# Altium PCB PCB.PcbDoc (part 2 of 2)
Units mil, origin at the board's own origin, x right, y up, seen from the top; angles counter-clockwise.
Board outline 11660 x 8265 mil, 2 copper layers (Top Layer, Bottom Layer); 173 components, 215 nets, 767 pads, 260 vias.
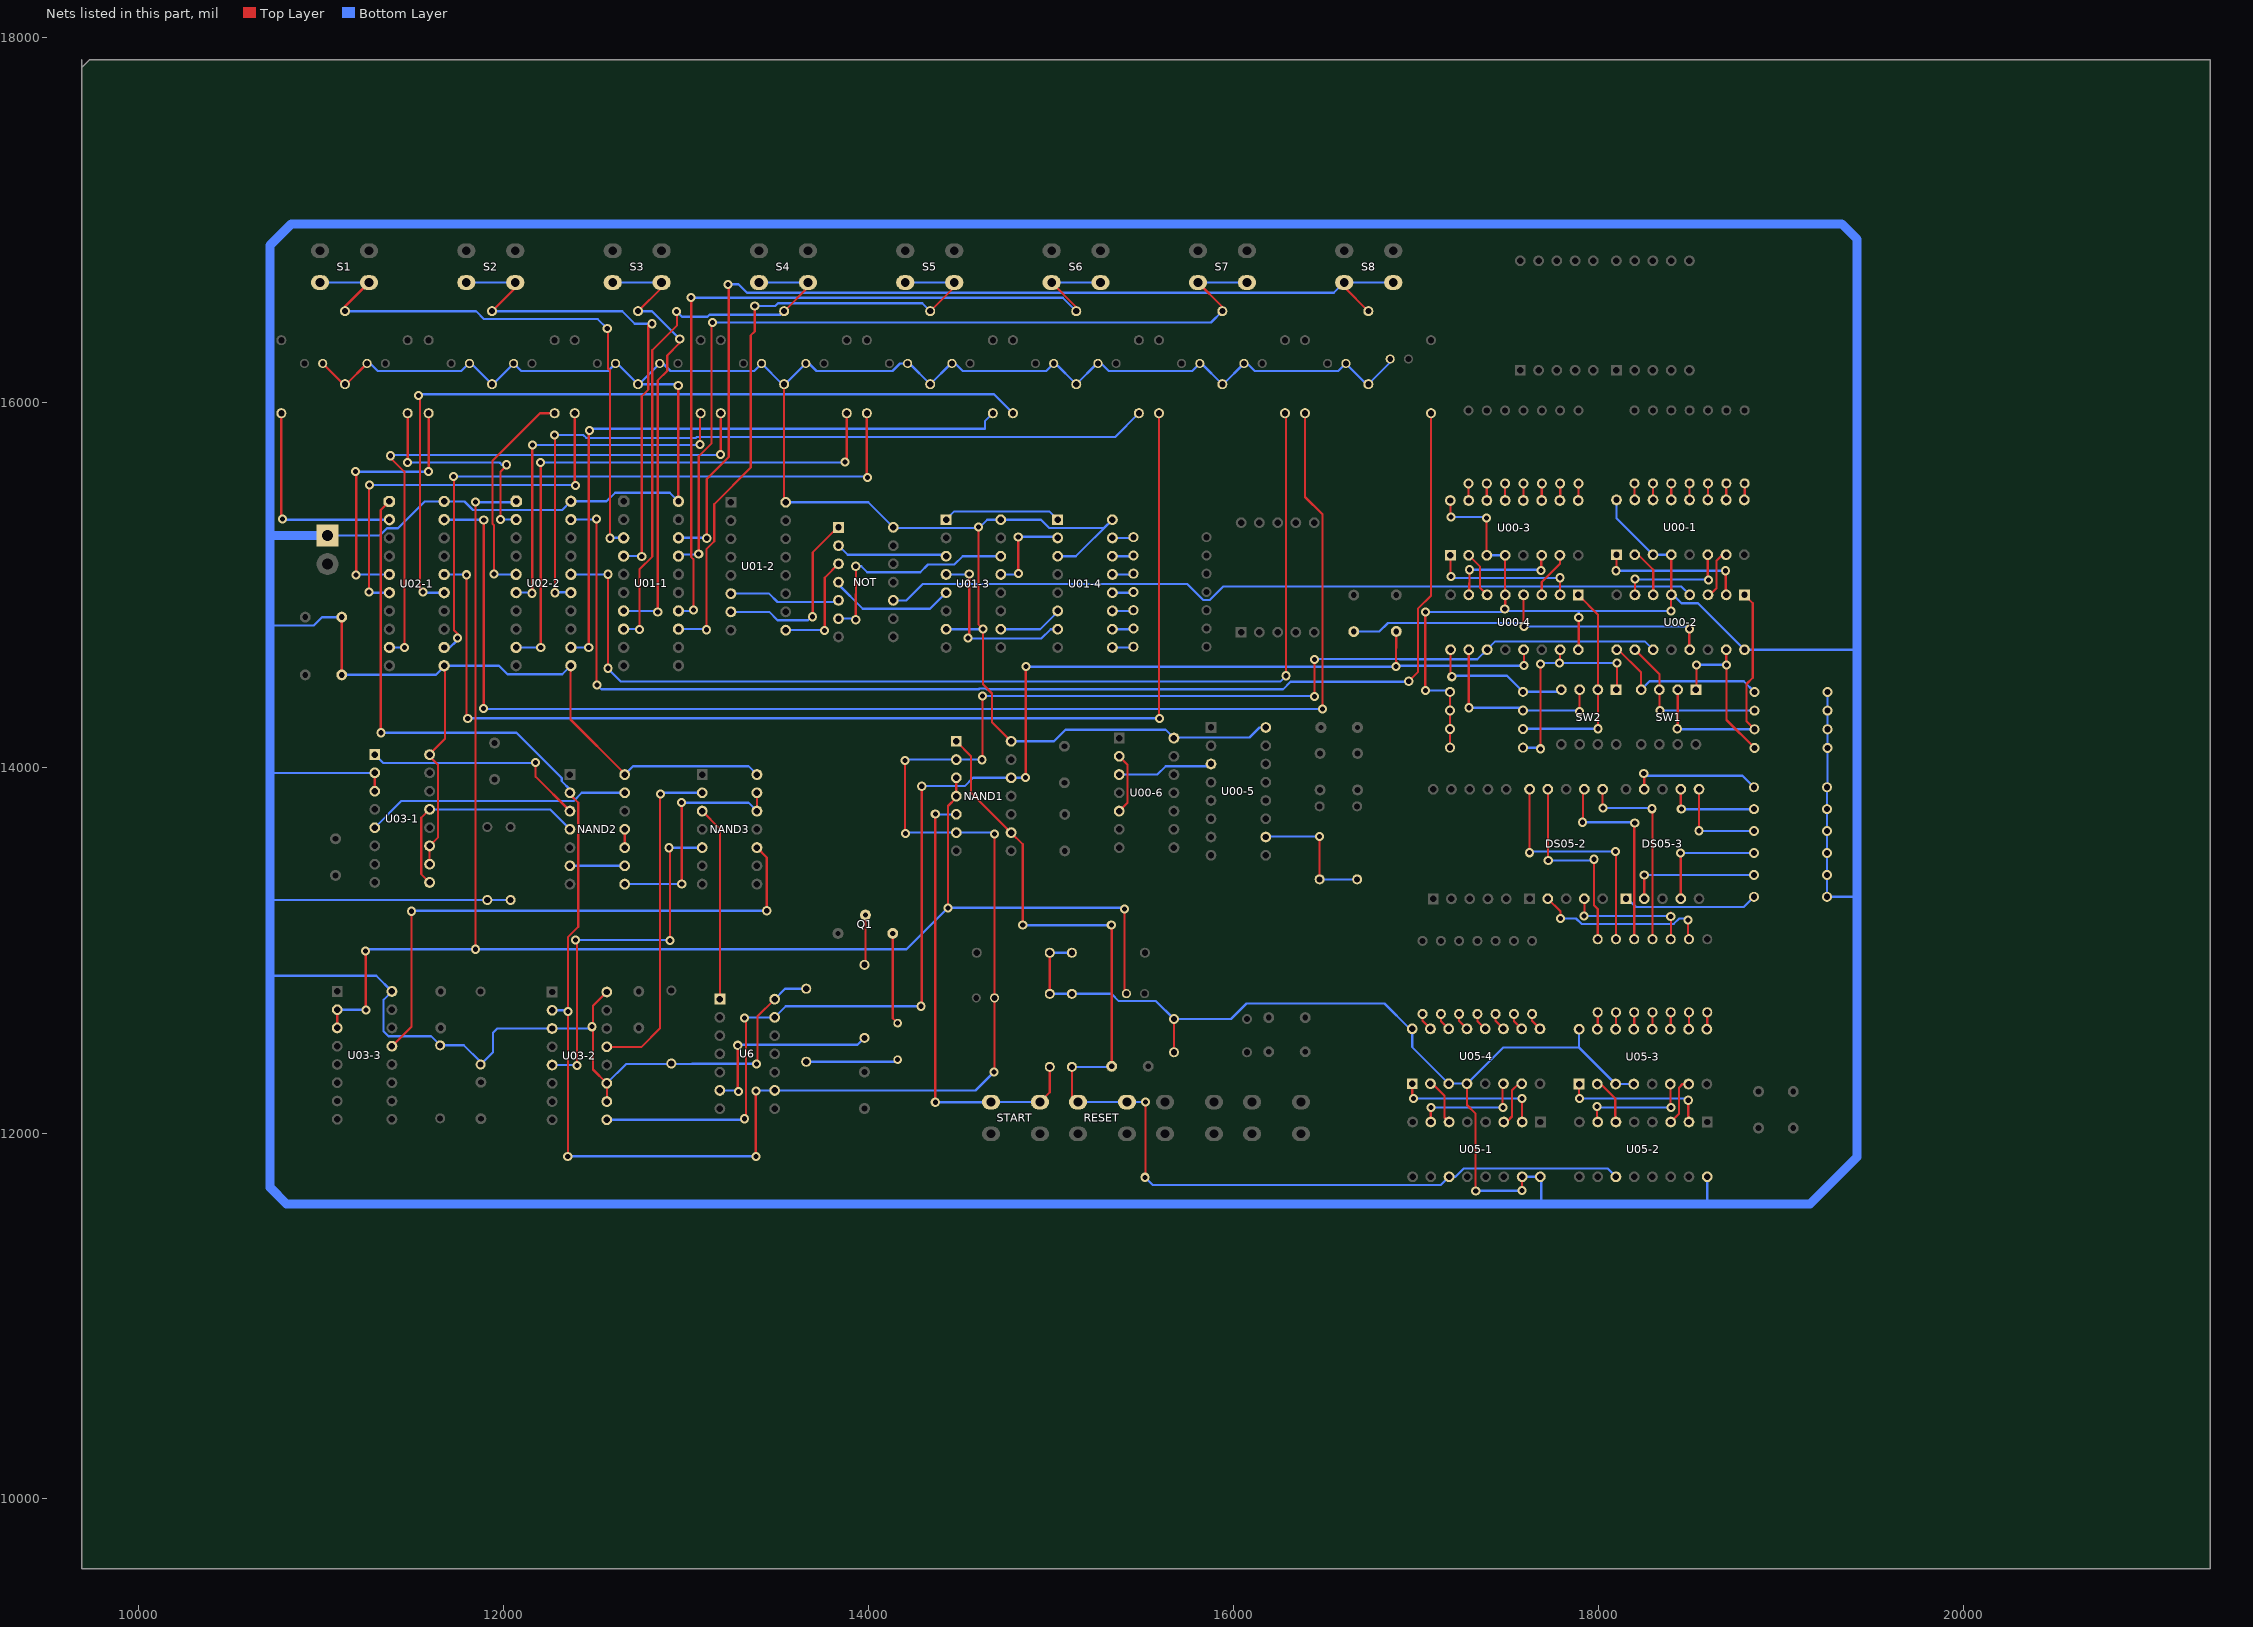
[diagram p2: the nets of this part, all layers, seen from the top]

## Via types
v1: diameter 50, hole 28, Top Layer to Bottom Layer, 260 vias

## Nets (pads, with @x,y where several pads share a name; then routed paths per layer and width w, separated by ;. In a path a pad name is that pad's centre, name@x,y a point inside that pad or via, vN(x,y) a via of type N, cw(c..) or ccw(c..) an arc to the next point about the centre after c; other vN are vias at no path point) (continued)
NetDS05-2_2: DS05-2.2 R262.2 | length 966.9
  Top Layer w12: DS05-2.2@17721,13284 17790,13215 v1@17790,13178 ; v1(18489,13168) 18489,13067.03 R262.2@18494.03,13062
  Bottom Layer w12: v1(17790,13176) 17875.02,13176 17905.02,13146 18410.98,13146 18440.98,13176 18488,13176 v1@18489,13177
NetDS05-2_4: DS05-2.4 R261.2 | length 699.5
  Top Layer w12: v1@17920,13208 17921,13209 DS05-2.4@17921,13284 ; v1@18394,13208 18394,13185 18395,13184 18395,13062.97 R261.2@18394.03,13062
  Bottom Layer w12: v1(17919,13190) 18391,13190 v1(18394,13187)
NetDS05-2_6: DS05-2.6 R260.2 | length 1093.7
  Top Layer w12: v1@18021,13779 DS05-2.6@18021,13884 ; v1@18294,13780 18294,13770 18294.53,13769.47 18294.53,13062.5 R260.2@18294.03,13062
  Bottom Layer w12: v1(18023,13780) 18289,13780 v1(18292,13777)
NetDS05-2_7: DS05-2.7 R259.2 | length 1112.8
  Top Layer w12: v1@17913,13702 17913,13876 DS05-2.7@17921,13884 ; v1@18194,13700 18194.53,13699.47 18194.53,13062.5 R259.2@18194.03,13062
  Bottom Layer w12: v1(17910,13703) 18192,13703 v1(18197,13698)
NetDS05-2_9: DS05-2.9 R264.2 | length 1086.6
  Top Layer w12: v1@17720,13498 17721,13499 DS05-2.9@17721,13884 ; v1@17973,13501 17973,13249.05 17994.03,13228.02 R264.2@17994.03,13062
  Bottom Layer w12: v1(17723,13494) 17967,13494 v1(17973,13500)
NetDS05-2_10: DS05-2.10 R265.2 | length 1294.6
  Top Layer w12: DS05-2.10@17621,13884 17621,13544 v1@17623,13542 ; v1@18091,13538 18094.03,13534.97 R265.2@18094.03,13062
  Bottom Layer w12: v1(17620,13536) 17626,13542 v1(18092,13542)
NetDS05-3_1: DS05-3.1 R270.2 | length 743
  Bottom Layer w12: DS05-3.1@18149,13284 18157.94,13284 18203.47,13238.47 18794.06,13238.47 R270.2@18850,13294.41
NetDS05-3_2: DS05-3.2 R269.2 | length 732
  Top Layer w12: DS05-3.2@18249,13284 v1(18249,13413) v1@18250,13412
  Bottom Layer w12: v1(18249,13413) 18848.59,13413 R269.2@18850,13414.41
NetDS05-3_4: DS05-3.4 R268.2 | length 654.1
  Top Layer w12: DS05-3.4@18449,13284 18449,13533 v1@18451,13535
  Bottom Layer w12: v1(18448,13535) 18849.41,13535 R268.2@18850,13534.41
NetDS05-3_6: DS05-3.6 R267.2 | length 543.9
  Top Layer w12: v1(18549,13656) DS05-3.6@18549,13884
  Bottom Layer w12: v1@18549,13661 18555.59,13654.41 R267.2@18850,13654.41 R267.2@18841.41,13663
NetDS05-3_7: DS05-3.7 R266.2 | length 507.8
  Top Layer w12: DS05-3.7@18449,13884 18449,13779 v1(18452,13776)
  Bottom Layer w12: v1@18451.41,13774.41 R266.2@18850,13774.41
NetDS05-3_9: DS05-3.9 R271.2 | length 718.3
  Top Layer w12: DS05-3.9@18249,13884 v1@18249,13967
  Bottom Layer w12: v1(18246,13970) 18259,13957 18787.41,13957 R271.2@18850,13894.41
NetNAND1_5: NAND1.5 R203.2 START.2 | length 3016.9
  Top Layer w12: v1@14363,12169 14366,12172 v1(14366,13747) ; START.2@14939,12170 14993,12224 R203.2@14993,12363
  Bottom Layer w12: v1(14366,12169) 14670,12169 START.2@14671,12170 ; v1@14369,13748 14371,13746 NAND1.5@14481,13746 ; START.2@14671,12170 START.2@14939,12170 ; START.2@14671,12170 START.2@14939,12170 ; START.2@14671,12170 START.2@14939,12170
NetNAND2_3: NAND2.3 U03-1.1 | length 1239.3
  Top Layer w12: v1(12177,14030) 12177,13952 NAND2.3@12365,13764
  Bottom Layer w12: U03-1.1@11296,14073.13 11341.53,14027.6 v1@12172.6,14027.6
NetNAND2_4: NAND2.4 U03-1.9 U03-1.13 | length 1251.9
  Top Layer w12: U03-1.9@11596,13373.13 11550.47,13418.65 11550.47,13727.6 U03-1.13@11596,13773.13
  Bottom Layer w12: U03-1.13@11596,13773.13 12255.87,13773.13 NAND2.4@12365,13664
NetNAND2_6: NAND2.6 NAND2.9 | length 300
  Bottom Layer w12: NAND2.6@12365,13464 NAND2.9@12665,13464
NetNAND2_8: NAND2.8 NAND3.12 NAND3.13 | length 1294.9
  Top Layer w12: v1(12977,13364) v1@12977,13811 ; NAND3.12@13389,13764 NAND3.13@13389,13864
  Bottom Layer w12: NAND2.8@12665,13364 12978,13364 v1@12979,13363 ; v1(12975,13811) 12976.47,13809.53 13343.47,13809.53 NAND3.12@13389,13764
NetNAND2_10: NAND2.10 NAND2.11 | length 100
  Top Layer w12: NAND2.10@12665,13564 NAND2.11@12665,13664
NetNAND2_13: NAND2.13 U03-1.5 | length 1448.2
  Bottom Layer w12: U03-1.5@11296,13673.13 11441.53,13818.65 11615.04,13818.65 11615.22,13818.47 12383.86,13818.47 12429.39,13864 NAND2.13@12665,13864
NetNAND3_2: NAND3.2 U03-2.13 | length 1857.3
  Top Layer w12: U03-2.13@12566,12471 12755,12471 12858,12574 12858,13856 v1(12860,13858)
  Bottom Layer w12: v1@12852,13866 12854,13864 NAND3.2@13089,13864
NetNAND3_3: NAND3.3 U6.1 | length 1070.2
  Top Layer w12: NAND3.3@13089,13764 13186,13667 U6.1@13186,12734
NetNAND3_5: NAND3.5 U03-2.5 | length 2034.1
  Top Layer w12: v1(12404,12370) v1@12404,13063 ; v1(12913,13055) 12913,13563 v1@12914,13564
  Bottom Layer w12: U03-2.5@12267,12373 12402,12373 v1@12404,12371 ; v1(12396,13058) 12907,13058 v1@12908,13057 ; v1(12908,13563) 13088,13563 NAND3.5@13089,13564
NetNAND3_10: NAND3.10 U03-3.13 | length 3087.7
  Top Layer w12: U03-3.13@11390,12476 11497,12583 v1(11497,13215) ; NAND3.10@13389,13564 13443,13510 v1@13443,13224
  Bottom Layer w12: v1@11501,13218 v1(13443,13218)
NetNOT_1: NOT.1 U01-2.7 | length 1010.1
  Top Layer w12: v1(13693,14828) 13695,14830 13695,15181 13831.87,15317.87 NOT.1@13835.84,15317.87
  Bottom Layer w12: U01-2.7@13246.76,14855 13455.71,14855 13501.24,14809.47 13667.47,14809.47 v1@13681,14823
NetNOT_2: NOT.2 U01-3.3 | length 613.1
  Bottom Layer w12: NOT.2@13835.84,15217.87 13885.72,15168 14416.92,15168 U01-3.3@14424.92,15160
NetNOT_3: NOT.3 U01-2.9 | length 609.5
  Top Layer w12: v1(13760,14754) 13760,15042.03 NOT.3@13835.84,15117.87
  Bottom Layer w12: U01-2.9@13546.76,14755 v1@13761,14755
NetNOT_4: NOT.4 U01-3.5 | length 693.1
  Bottom Layer w12: NOT.4@13835.84,15017.87 13835.84,15005.16 13968.65,14872.35 14337.27,14872.35 U01-3.5@14424.92,14960
NetNOT_5: NOT.5 U01-2.6 | length 611.4
  Bottom Layer w12: U01-2.6@13246.76,14955 13455.71,14955 13501.24,14909.47 13827.44,14909.47 NOT.5@13835.84,14917.87
NetNOT_6: NOT.6 U01-3.14 | length 1227
  Top Layer w12: v1(13930,14812) v1@13931,15100
  Bottom Layer w12: NOT.6@13835.84,14817.87 13929.87,14817.87 v1@13930,14818 ; v1(13930,15105) 13961,15105 13993.65,15072.35 14284.35,15072.35 14326.47,15114.47 14470.45,15114.47 14515.98,15160 U01-3.14@14724.92,15160
NetNOT_10: NOT.10 U00-2.4 | length 4462.9
  Bottom Layer w12: NOT.10@14157.84,14917.87 14207.87,14917.87 14297.56,15007.56 15745.84,15007.56 15832.96,14920.44 15869.04,14920.44 15942.6,14994 18452.03,14994 U00-2.4@18498.03,14948
NetQ1_2: Q1.2 R155.2 | length 271.5
  Top Layer w12: R155.2@13978,12922 13983.94,12927.94 Q1.2@13983.94,13191
NetQ1_3: Q1.3 SP.2 | length 503.2
  Top Layer w12: Q1.3@14133,13094 14133,12629 SP.2@14160,12602
NetR00_2: R00.2 SW1.4 U00-2.9 | length 943.8
  Top Layer w12: U00-2.9@18098.03,14648 18107,14648 18232,14523 SW1.4@18232,14429
  Bottom Layer w12: SW1.4@18232,14429 18277.53,14474.53 18794.47,14474.53 R00.2@18853,14416
NetR01_2: R01.2 SW1.3 U00-2.10 | length 903.9
  Top Layer w12: U00-2.10@18198.03,14648 18332,14514.03 SW1.3@18332,14429 v1@18332,14318
  Bottom Layer w12: v1(18335,14315) 18852,14315 R01.2@18853,14314
NetR02_2: R02.2 SW1.2 U00-2.1 | length 1422.9
  Top Layer w12: v1(18430,14215) 18432,14217 SW1.2@18432,14429 ; U00-2.1@18798.03,14948 18843.56,14902.47 18843.56,14493.68 18809.44,14459.56 18809.44,14255.56 R02.2@18853,14212
  Bottom Layer w12: v1@18432,14212 R02.2@18853,14212
NetR03_2: R03.2 SW1.1 U00-2.15 | length 895.6
  Top Layer w12: SW1.1@18532,14429 18535,14432 v1(18535,14565) ; v1@18698.03,14568.03 U00-2.15@18698.03,14648 ; v1(18700,14565) 18700,14263 R03.2@18853,14110
  Bottom Layer w12: v1@18540,14565 v1(18700,14565)
NetR04_2: R04.2 SW2.4 U00-4.9 | length 792.3
  Top Layer w12: U00-4.9@17188.03,14648 17188.03,14506.97 v1(17195,14500)
  Bottom Layer w12: v1@17195,14505 17497,14505 R04.2@17585,14417 17783,14417 SW2.4@17795,14429
NetR05_2: R05.2 SW2.3 U00-4.10 | length 1067.3
  Top Layer w12: U00-4.10@17288.03,14648 17288.03,14331.97 v1(17290,14330) ; v1@17895,14315 SW2.3@17895,14429
  Bottom Layer w12: v1(17290,14330) R05.2@17570,14330 ; v1(17895,14310) 17890,14315 R05.2@17585,14315 ; R05.2@17570,14330 R05.2@17585,14315 ; R05.2@17570,14330 R05.2@17585,14315
NetR06_2: R06.2 SW2.2 U00-4.1 | length 1188.1
  Top Layer w12: U00-4.1@17888.03,14948 17995,14841.03 SW2.2@17995,14429 v1(17995,14215)
  Bottom Layer w12: R06.2@17585,14213 17587,14215 v1(17995,14215)
NetR07_2: R07.2 SW2.1 U00-4.15 | length 1183.1
  Top Layer w12: v1@17680,14115 v1(17680,14570) ; v1@17788.03,14581.97 U00-4.15@17788.03,14648 ; SW2.1@18095,14429 18100,14434 v1(18100,14575)
  Bottom Layer w12: R07.2@17585,14111 v1@17679,14111 ; v1@17680,14575 v1(17785,14575) v1(18100,14575)
  other v1: 17680,14105
NetR08_1: R08.1 U00-3.13 | length 93
  Top Layer w12: U00-3.13@17487.03,15465 R08.1@17487,15558
NetR09_1: R09.1 U00-3.12 | length 93.2
  Top Layer w12: U00-3.12@17587.03,15465 17587.5,15465.47 R09.1@17587.5,15558
NetR10_1: R10.1 U00-3.11 | length 93.4
  Top Layer w12: U00-3.11@17687.03,15465 17688,15465.97 R10.1@17688,15558
NetR11_1: R11.1 U00-3.10 | length 93.6
  Top Layer w12: U00-3.10@17787.03,15465 17788.5,15466.47 R11.1@17788.5,15558
NetR12_1: R12.1 U00-3.9 | length 93.8
  Top Layer w12: U00-3.9@17887.03,15465 17889,15466.97 R12.1@17889,15558
NetR13_1: R13.1 U00-3.15 | length 93.4
  Top Layer w12: R13.1@17286,15558 17286,15466.03 U00-3.15@17287.03,15465
NetR14_1: R14.1 U00-3.14 | length 93.2
  Top Layer w12: R14.1@17386.5,15558 17386.5,15465.53 U00-3.14@17387.03,15465
NetR15_1: R15.1 U00-1.13 | length 91
  Top Layer w12: U00-1.13@18397.03,15468 R15.1@18397,15559
NetR16_1: R16.1 U00-1.12 | length 91.2
  Top Layer w12: U00-1.12@18497.03,15468 18497.5,15468.47 R16.1@18497.5,15559
NetR17_1: R17.1 U00-1.11 | length 91.4
  Top Layer w12: U00-1.11@18597.03,15468 18598,15468.97 R17.1@18598,15559
NetR18_1: R18.1 U00-1.10 | length 91.6
  Top Layer w12: U00-1.10@18697.03,15468 18698.5,15469.47 R18.1@18698.5,15559
NetR19_1: R19.1 U00-1.9 | length 91.8
  Top Layer w12: U00-1.9@18797.03,15468 18799,15469.97 R19.1@18799,15559
NetR20_1: R20.1 U00-1.15 | length 91.4
  Top Layer w12: U00-1.15@18196,15469.03 R20.1@18196,15559
  Top Layer w50: U00-1.15@18196,15469.03 U00-1.15@18197.03,15468
NetR21_1: R21.1 U00-1.14 | length 91.2
  Top Layer w12: U00-1.14@18296.5,15468.53 R21.1@18296.5,15559
  Top Layer w50: U00-1.14@18296.5,15468.53 U00-1.14@18297.03,15468
NetR22_1: R22.1 R23.1 U00-5.10 | length 735.4
  Top Layer w12: R23.1@16471,13390 v1(16471,13624)
  Bottom Layer w12: U00-5.10@16176,13621.88 16178.12,13624 v1(16471,13624) ; R23.1@16471,13390 R22.1@16676.56,13390
NetR50_1: R50.1 S1.2 U01-1.3 | length 3180.2
  Top Layer w12: R50.1@11133,16502 11133,16528 S1.2@11264,16659 ; v1@12573.58,16411.58 12573.58,16188.15 12584,16177.73 v1(12584,15258)
  Bottom Layer w12: S1.2@10996,16659 S1.2@11264,16659 ; R50.1@11133,16502 11850.88,16502 11894.44,16458.44 12517.56,16458.44 v1(12569,16407) ; v1@12591.51,15260.51 U01-1.3@12659.16,15260.51
NetR51_1: R51.1 S2.2 U01-1.4 | length 2774.9
  Top Layer w12: R51.1@11938,16502 12065.43,16629.43 S2.2@12065.43,16659 ; v1(12758,15158) 12758,16036.84 12793.6,16072.44 12793.6,16425.6 v1@12802,16434
  Bottom Layer w12: S2.2@11797.43,16659 S2.2@12065.43,16659 ; R51.1@11938,16502 12650.88,16502 12719.88,16433 v1(12814,16433) ; U01-1.4@12665.65,15167 U01-1.4@12659.16,15160.51 12737.51,15160.51 v1@12739,15162 ; v1(12758,15158) 12756,15160 12756,15163 v1@12758,15165
NetR52_1: R52.1 S3.2 U01-1.7 | length 2501.1
  Top Layer w12: R52.1@12738,16502 12866.86,16630.86 S3.2@12866.86,16659 ; v1(12846,14854) 12846,16122.96 12897.6,16174.56 12897.6,16259.6 12964,16326 v1@12964,16349
  Bottom Layer w12: S3.2@12598.86,16659 S3.2@12866.86,16659 ; U01-1.7@12659.16,14860.51 12843.51,14860.51 v1@12846,14863 ; R52.1@12738,16502 12814,16502 v1(12966,16350)
NetR53_1: R53.1 S4.2 U01-1.8 | length 2999
  Top Layer w12: v1(12745,14758) 12745,15087.02 12815.6,15157.62 12815.6,16288.6 12952,16425 v1@12952,16502 ; R53.1@13538,16502 13668.29,16632.29 S4.2@13668.29,16659
  Bottom Layer w12: U01-1.8@12659.16,14760.51 12734.49,14760.51 v1@12735,14760 ; v1(12949,16501) 12979,16471 13118.02,16471 13129.02,16482 13518,16482 R53.1@13538,16502 ; S4.2@13400.29,16659 S4.2@13668.29,16659
NetR54_1: R54.1 S5.2 U01-1.13 | length 3497.8
  Top Layer w12: v1(13112,14757) 13112,15198.02 13155,15241.02 13155,15444.92 13355.58,15645.5 13355.58,16369.58 ; 13356,16370 13355.58,16369.58 ; v1(13377,16530) 13377,16391 13355.58,16369.58 ; R54.1@14338,16502 14469.71,16633.71 S5.2@14469.71,16659
  Bottom Layer w12: U01-1.13@12959.16,14760.51 v1@13108.51,14760.51 ; v1(13377,16530) 13488.84,16530 13504.4,16545.56 14294.44,16545.56 R54.1@14338,16502 ; S5.2@14201.71,16659 S5.2@14469.71,16659
NetR55_1: R55.1 S6.2 U01-1.14 | length 4406.6
  Top Layer w12: v1@13030,16567 13029,16566 13029,15155.02 13041,15143.02 v1(13041,14865) ; S6.2@15003.14,16659 15138,16524.14 R55.1@15138,16502
  Bottom Layer w12: U01-1.14@12959.16,14860.51 13029.51,14860.51 v1@13034,14865 ; v1(13027,16576) 15064,16576 R55.1@15138,16502 ; S6.2@15003.14,16659 S6.2@15271.14,16659
NetR56_1: R56.1 S7.2 U01-1.17 | length 4707.7
  Top Layer w12: v1(13070,15172) 13070,15707.02 13141,15778.02 v1@13141,16439 ; S7.2@15804.57,16659 15938,16525.57 R56.1@15938,16502
  Bottom Layer w12: U01-1.17@12959.16,15160.51 12967.65,15169 v1@13068,15169 ; v1(13145,16440) 15876,16440 R56.1@15938,16502 ; S7.2@15804.57,16659 S7.2@16072.57,16659
NetR57_1: R57.1 S8.2 U01-1.18 | length 5484.1
  Top Layer w12: v1(13114,15258) 13114,15583.02 13234.56,15703.58 13234.56,16649.44 v1@13234,16650 ; S8.2@16606,16659 16606,16634 R57.1@16738,16502
  Bottom Layer w12: U01-1.18@12959.16,15260.51 13110.51,15260.51 v1@13114,15264 ; v1(13231,16649) 13288.29,16649 13334.29,16603 16549,16603 S8.2@16602,16656 ; S8.2@16606,16659 S8.2@16868,16658
NetR58_1: R58.1 U01-4.13 | length 116.7
  Bottom Layer w12: U01-4.13@15336,15060 15447,15060 R58.1@15451,15064
NetR59_1: R59.1 U01-4.12 | length 116.7
  Bottom Layer w12: U01-4.12@15336,14960 15447,14960 R59.1@15451,14964
NetR60_1: R60.1 U01-4.11 | length 116.7
  Bottom Layer w12: U01-4.11@15336,14860 15447,14860 R60.1@15451,14864
NetR61_1: R61.1 U01-4.10 | length 117.7
  Bottom Layer w12: U01-4.10@15336,14760 15448,14760 R61.1@15452,14764
NetR62_1: R62.1 U01-4.9 | length 116.7
  Bottom Layer w12: U01-4.9@15336,14660 15447,14660 R62.1@15451,14664
NetR63_1: R63.1 U01-4.15 | length 116.7
  Bottom Layer w12: U01-4.15@15336,15260 15447,15260 R63.1@15451,15264
NetR64_1: R64.1 U01-4.14 | length 116.7
  Bottom Layer w12: U01-4.14@15336,15160 15447,15160 R64.1@15451,15164
NetR100_1: R100.1 U02-1.2 | length 1159.9
  Top Layer w12: R100.1@10784,15935 10784,15370 v1(10791,15363)
  Bottom Layer w12: v1@10791,15360 U02-1.2@11376,15360
NetR101_1: R101.1 U02-1.5 | length 1477.6
  Top Layer w12: v1(11194,15057) 11194,15614 v1@11195,15615 ; v1(11590,15624) 11591,15625 R101.1@11591,15945
  Bottom Layer w12: v1(11191,15623) 11585,15623 v1@11591,15629 ; v1@11192,15060 U02-1.5@11376,15060 U02-1.5@11368,15068
NetR102_1: R102.1 U02-1.6 | length 2227.3
  Top Layer w12: v1(11265,14963) 11265,15549 v1@11267,15551 ; R102.1@12391,15950 12391,15551 v1(12395,15547)
  Bottom Layer w12: v1(11266,15550) 12390,15550 v1@12392,15552 ; v1@11269,14960 U02-1.6@11376,14960
NetR103_1: R103.1 U02-1.9 | length 3198.8
  Top Layer w12: v1@11380,15704 11380,15700 11458,15622 11458,15506 v1(11458,14659) ; v1(13189,15716) 13191,15718 R103.1@13191,15943
  Bottom Layer w12: U02-1.9@11376,14660 v1@11461,14660 ; v1(11381,15710) 11385,15714 v1@13188,15714
NetR104_1: R104.1 U02-1.12 | length 3600.6
  Top Layer w12: v1@11730,15586 11730,14754 11758,14726 11758,14711 11757,14710 11750,14710 v1(11749,14711) ; R104.1@13991,15943 13991,15593 v1(13994,15590)
  Bottom Layer w12: U02-1.12@11676,14660 11707,14660 v1@11743,14696 ; v1(11727,15596) v1@13995,15596
NetR105_1: R105.1 U02-1.15 | length 4519.3
  Top Layer w12: v1@11543,16039 11543,14980 v1(11560,14963) v1@11545,14978
  Bottom Layer w12: v1@11531,16047 14515,16047 14687,16047 R105.1@14791,15943 ; v1@11564,14960 U02-1.15@11676,14960
  other v1: 11535,16040
NetR106_1: R106.1 U02-1.16 | length 6355.9
  Top Layer w12: v1(11798,15058) 11798,14279 v1(11805,14272) ; v1@15591,14269 R106.1@15591,15943
  Bottom Layer w12: U02-1.16@11676,15060 v1@11794,15060 ; v1@11818,14272 v1(15593,14272)
NetR107_1: R107.1 U02-1.19 | length 7486.9
  Top Layer w12: v1(11891,14325) 11893,14327 v1(11893,15358) ; R107.1@16391,15943 16391,15484.52 16486.53,15388.99 v1@16486.53,14327.47
  Bottom Layer w12: U02-1.19@11676,15360 v1@11886,15360 ; v1@11899,14323 v1(16487,14323)
NetR108_1: R108.1 U02-2.2 | length 1216.9
  Top Layer w12: v1@11476,15672 R108.1@11476,15942 ; v1(11984,15360) 11984,15623 v1@12021,15660
  Bottom Layer w12: v1(11476,15673) 11979,15673 11991,15661 v1(12017,15661) ; v1@11984.51,15360.51 U02-2.2@12070.08,15360.51
NetR109_1: R109.1 U02-2.5 | length 1191.5
  Top Layer w12: v1(11949,15063) 11949,15329 11941,15337 11941,15682.98 12201.02,15943 R109.1@12281,15943
  Bottom Layer w12: v1@11951,15057 11954.51,15060.51 U02-2.5@12070.08,15060.51
NetR110_1: R110.1 U02-2.6 | length 1986.1
  Top Layer w12: v1(12158,14957) v1@12158,15763 ; v1(13077,15772) 13077,15939 R110.1@13081,15943
  Bottom Layer w12: U02-2.6@12070.08,14960.51 v1@12159.51,14960.51 ; v1(12159,15769) v1@13077,15769
NetR111_1: R111.1 U02-2.9 | length 3088.6
  Top Layer w12: v1(12205,14659) 12205,15674 v1@12206,15675 ; v1(13872,15676) 13881,15685 R111.1@13881,15943
  Bottom Layer w12: U02-2.9@12070.08,14660.51 v1@12203.51,14660.51 ; v1(12204,15673) v1@13872,15673
NetR112_1: R112.1 U02-2.12 | length 3558.9
  Top Layer w12: v1(12468,14660) v1@12468,15847
  Bottom Layer w12: U02-2.12@12370.08,14660.51 v1@12468.49,14660.51 ; v1(12471,15849) 12479.56,15857.56 14637.44,15857.56 14637.44,15899.44 R112.1@14681,15943
NetR113_1: R113.1 U02-2.15 | length 4208.2
  Top Layer w12: v1(12283,14960) v1@12283,15820
  Bottom Layer w12: v1(12281,15823) 12439.02,15823 12454.02,15808 13055.02,15808 13060.02,15813 15351,15813 R113.1@15481,15943 ; v1@12285,14963 12367.59,14963 U02-2.15@12370.08,14960.51
NetR114_1: R114.1 U02-2.16 | length 5914
  Top Layer w12: v1(12574,14546) v1(12574,15061) ; R114.1@16281,15943 16286.53,15937.47 v1@16286.53,14502.53
  Bottom Layer w12: U02-2.16@12370.08,15060.51 v1@12572.49,15060.51 ; v1@12575,14542 12644,14473 16255,14473 v1(16287,14505)
NetR115_1: R115.1 U02-2.19 | length 7050.8
  Top Layer w12: v1@12511,14451 v1(12511,15363) ; v1(16959,14475) 17009,14525 17009,14871.98 17081,14943.98 R115.1@17081,15943
  Bottom Layer w12: U02-2.19@12370.08,15360.51 v1@12507.49,15360.51 ; v1(12514,14454) 12537,14431 14604.02,14431 14608.02,14435 14641.98,14435 14645.98,14431 16270.98,14431 16311.98,14472 v1@16967,14472
NetR155_1: R155.1 U6.6 | length 1072.2
  Top Layer w12: v1(13284,12481) 13284,12233 v1(13288,12229)
  Bottom Layer w12: U6.6@13186,12234 13277,12234 13279,12232 v1@13291,12232 ; v1@13281,12484 13940,12484 R155.1@13978,12522
NetR156_1: R156.1 SP.1 | length 505.6
  Bottom Layer w12: R156.1@13659,12391 14149,12391 SP.1@14160,12402
NetR252_1: R252.1 U05-4.13 | length 99.8
  Top Layer w12: R252.1@17235.03,12653 17235.03,12613.97 U05-4.13@17278,12571
NetR253_1: R253.1 U05-4.12 | length 99.8
  Top Layer w12: R253.1@17335.03,12653 17335.03,12613.97 U05-4.12@17378,12571
NetR254_1: R254.1 U05-4.11 | length 99.8
  Top Layer w12: R254.1@17435.03,12653 17435.03,12613.97 U05-4.11@17478,12571
NetR255_1: R255.1 U05-4.10 | length 99.8
  Top Layer w12: R255.1@17535.03,12653 17535.03,12613.97 U05-4.10@17578,12571
NetR256_1: R256.1 U05-4.9 | length 99.8
  Top Layer w12: R256.1@17635.03,12653 17635.03,12613.97 U05-4.9@17678,12571
NetR257_1: R257.1 U05-4.15 | length 99.8
  Top Layer w12: R257.1@17035.03,12653 17035.03,12613.97 U05-4.15@17078,12571
NetR258_1: R258.1 U05-4.14 | length 99.8
  Top Layer w12: R258.1@17135.03,12653 17135.03,12613.97 U05-4.14@17178,12571
NetR259_1: R259.1 U05-3.13 | length 93.8
  Top Layer w12: U05-3.13@18192,12569 18194.03,12571.03 R259.1@18194.03,12662
NetR260_1: R260.1 U05-3.12 | length 93.8
  Top Layer w12: U05-3.12@18292,12569 18294.03,12571.03 R260.1@18294.03,12662
NetR261_1: R261.1 U05-3.11 | length 93.8
  Top Layer w12: U05-3.11@18392,12569 18394.03,12571.03 R261.1@18394.03,12662
NetR262_1: R262.1 U05-3.10 | length 93.8
  Top Layer w12: U05-3.10@18492,12569 18494.03,12571.03 R262.1@18494.03,12662
NetR263_1: R263.1 U05-3.9 | length 93.8
  Top Layer w12: U05-3.9@18592,12569 18594.03,12571.03 R263.1@18594.03,12662
NetR264_1: R264.1 U05-3.15 | length 93.8
  Top Layer w12: U05-3.15@17992,12569 17994.03,12571.03 R264.1@17994.03,12662
NetR265_1: R265.1 U05-3.14 | length 93.8
  Top Layer w12: U05-3.14@18092,12569 18094.03,12571.03 R265.1@18094.03,12662
NetU00-1_1: U00-1.1 U00-2.2 | length 822.3
  Top Layer w12: v1@18097.03,15082.03 U00-1.1@18097.03,15168 ; v1(18695,15080) 18695,14951.03 U00-2.2@18698.03,14948
  Bottom Layer w12: v1(18095,15080) v1@18698.03,15080
NetU00-1_2: U00-1.2 U00-2.6 | length 272.9
  Top Layer w12: U00-1.2@18197.03,15168 18216,15168 18298.03,15085.97 U00-2.6@18298.03,14948
NetU00-1_6: U00-1.6 U00-2.7 | length 627
  Top Layer w12: U00-2.7@18198.03,14948 v1@18198.03,15031.97 ; v1@18597.03,15032.03 U00-1.6@18597.03,15168
  Bottom Layer w12: v1(18199,15035) 18199,15031 18201,15033 18597,15033 v1(18600,15030)
NetU00-1_7: U00-1.7 U00-2.3 | length 278
  Top Layer w12: U00-2.3@18598.03,14948 18605,14954.97 18614.97,14954.97 18645,14985 18645,15135 18678,15168 U00-1.7@18697.03,15168
NetU00-3_1: U00-3.1 U00-4.2 | length 813.9
  Top Layer w12: v1@17187.03,15043 U00-3.1@17187.03,15165 ; U00-4.2@17788.03,14948 v1@17788.03,15039.97
  Bottom Layer w12: v1@17190,15045 17195,15040 17205,15040 17675,15040 17785,15040 v1(17787,15042)
  other v1: 17191,15049
NetU00-3_2: U00-3.2 U00-4.6 | length 258.8
  Top Layer w12: U00-3.2@17287.03,15165 17350,15102.03 17350,14986.03 U00-4.6@17388.03,14948
NetU00-3_6: U00-3.6 U00-4.7 | length 616.1
  Top Layer w12: U00-4.7@17288.03,14948 17290,14949.97 v1(17292,15086) ; v1(17684,15081) 17684,15080 17685,15081 17685,15162.97 U00-3.6@17687.03,15165
  Bottom Layer w12: v1(17292,15086) v1@17682,15086
NetU00-3_7: U00-3.7 U00-4.3 | length 258
  Top Layer w12: U00-4.3@17688.03,14948 17688.03,15019.03 17787.03,15118.03 U00-3.7@17787.03,15165
NetU00-5_3: U00-5.3 U00-6.3 | length 527
  Bottom Layer w12: U00-6.3@15373,13964 15581.94,13964 15627.47,14009.53 15863.65,14009.53 U00-5.3@15876,14021.88
NetU00-6_2: U00-6.2 U00-6.5 | length 337.7
  Top Layer w12: U00-6.5@15373,13764 15418.53,13809.53 15418.53,14018.47 U00-6.2@15373,14064
NetU01-3_1: U01-3.1 U01-4.1 | length 648.8
  Bottom Layer w12: U01-3.1@14424.92,15360 14470.45,15405.53 14990.47,15405.53 U01-4.1@15036,15360
NetU01-3_4: U01-3.4 U01-4.7 | length 985.7
  Top Layer w12: v1(14545,14711) 14552,14718 v1(14552,15062)
  Bottom Layer w12: U01-3.4@14424.92,15060 v1@14548,15060 ; v1@14548,14710 14948,14710 14998,14760 U01-4.7@15036,14760
NetU01-3_10: U01-3.10 U01-4.6 | length 354.8
  Bottom Layer w12: U01-3.10@14724.92,14760 14940,14760 15036,14856 U01-4.6@15036,14860
NetU01-3_13: U01-3.13 U01-4.2 | length 517.4
  Top Layer w12: v1(14820,15266) 14820,15066 v1(14821,15065)
  Bottom Layer w12: U01-3.13@14724.92,15060 14818,15060 v1@14817,15061 ; v1@14817,15266 15030,15266 U01-4.2@15036,15260
NetU05-1_2: U05-1.2 U05-4.1 | length 779
  Top Layer w12: v1@16978,12208 16978,12190 U05-4.1@16978,12246 ; U05-1.2@17580,12075 v1@17580,12185
  Bottom Layer w12: v1(16985,12190) v1(17580,12190)
NetU05-1_3: U05-1.3 U05-4.7 | length 283.5
  Top Layer w12: U05-1.3@17490,12071 U05-1.3@17480,12061 17484.5,12065.5 17499.5,12065.5 17525,12091 17525,12235 17561,12271 U05-4.7@17578,12271
NetU05-1_6: U05-1.6 U05-4.2 | length 258.7
  Top Layer w12: U05-4.2@17078,12271 17089,12271 17155,12205 17155,12101 17155,12086 U05-1.6@17180,12061
NetU05-1_7: U05-1.7 U05-4.6 | length 588
  Top Layer w12: U05-1.7@17080,12061 v1(17080,12140) ; v1@17473,12142 U05-4.6@17473,12256
  Bottom Layer w12: v1(17080,12140) v1(17475,12140)
NetU05-2_2: U05-2.2 U05-3.1 | length 806.7
  Top Layer w12: v1@17892,12183 U05-3.1@17892,12269 ; v1(18490,12180) 18490,12065 U05-2.2@18494,12061
  Bottom Layer w12: v1(17895,12190) v1@18495,12190
NetU05-2_3: U05-2.3 U05-3.7 | length 267.9
  Top Layer w12: U05-2.3@18394,12061 18440,12107 18440,12250 18459,12269 U05-3.7@18492,12269
NetU05-2_6: U05-2.6 U05-3.2 | length 261.4
  Top Layer w12: U05-3.2@17992,12269 18011,12269 18090,12190 18090,12065 U05-2.6@18094,12061
NetU05-2_7: U05-2.7 U05-3.6 | length 622.7
  Top Layer w12: v1(17990,12145) 17990,12065 U05-2.7@17994,12061 ; v1@18392,12137 U05-3.6@18392,12269
  Bottom Layer w12: v1@17990,12140 v1(18395,12140)
RES1: C04-1.2 NAND1.1 NAND1.9 R202.2 RESET.2 U05-1.11 U05-2.11 | length 6545.2
  Top Layer w12: NAND1.1@14481,14146 14562,14065 14562,13865 NAND1.9@14781,13646 14845,13582 v1(14845,13139) ; R202.2@15114,12363 15114,12203.67 RESET.2@15147.67,12170 ; C04-1.2@15332,12366 15332,13137 v1@15334,13139 ; v1(15514,11758) 15517,11761 v1(15517,12170)
  Bottom Layer w12: v1(14845,13139) v1(15330,13139) ; R202.2@15114,12363 15329,12363 C04-1.2@15332,12366 ; v1@15509,11765 v1@15513,11761 ; v1@15509,12170 RESET.2@15415.67,12170 ; v1(15514,11758) 15556.53,11715.47 17134.47,11715.47 U05-1.11@17180,11761 17215.61,11761 17261.14,11806.53 18048.47,11806.53 U05-2.11@18094,11761 ; RESET.2@15415.67,12170 RESET.2@15147.67,12170 RESET.2@15415.67,12170
RES2: D04-1.2 NAND1.3 NAND1.4 U02-2.1 U03-3.2 U03-3.3 | length 8720.2
  Top Layer w12: U03-3.3@11090,12576 U03-3.2@11090,12676 ; v1(11246,12998) 11246,12676 v1(11248,12674) ; v1(11848,15457) 11847,15456 11847,13009 v1@11850,13006 ; v1@14437,13236 14435.47,13237.53 14435.47,13791.53 14481,13837.06 NAND1.4@14481,13846 NAND1.3@14481,13946 ; v1(15403,13227) 15403,12773.44 D04-1.2@15412.44,12764
  Bottom Layer w12: U03-3.2@11090,12676 11242,12676 v1@11244,12674 ; v1@11246,12999 11254,13007 v1(11848,13007) 14208,13007 v1(14435,13234) 15392,13234 v1@15407,13219 ; v1(11848,15457) 11846,15455 U02-2.1@12070.08,15455
SATA: D04-2.2 NAND1.2 NAND1.6 NAND2.2 U00-2.11 U00-4.11 U02-1.1 U03-2.2 U6.9 | length 14256.4
  Top Layer w12: v1@11329,14194 11329,15413 U02-1.1@11376,15460 ; v1@12355,11873 v1(12355,12666) 12355,13074.98 12410.53,13130.51 12410.53,13809.53 12365,13855.06 NAND2.2@12365,13864 ; v1@13383,11878 v1(13383,12230) ; v1(14200,14041) 14200,13643 v1(14202,13641) ; v1(14622,14045) 14625,14048 v1(14625,14394) ; v1(14688,12334) 14690.44,12336.44 D04-2.2@14690.44,12741 ; D04-2.2@14691,12741.56 v1(14691,13639) ; v1(16443,14392) v1(16443,14595)
  Bottom Layer w12: v1(11329,14193) 12071.98,14193 12319.47,13945.51 12319.47,13927.85 12365,13882.32 NAND2.2@12365,13864 ; U03-2.2@12267,12673 v1@12356,12673 ; v1(12353,11873) v1(13383,11873) ; v1@13382,12234 U6.9@13486,12234 14543,12234 14586,12234 v1@14690,12338 ; v1@14196,14048 14198,14046 NAND1.2@14481,14046 v1@14625,14046 ; v1@14199,13639 14206,13646 NAND1.6@14481,13646 14688,13646 v1@14690,13648 ; v1@14626,14395 v1@16444,14395 ; v1@16438,14597 16906.98,14597 16908.98,14595 17335.03,14595 U00-4.11@17388.03,14648 17433.56,14693.53 18252.5,14693.53 U00-2.11@18298.03,14648
TCD1: C00-5.2 U00-2.13 U00-4.4 | length 2169.2
  Top Layer w12: v1@17588.03,14770 U00-4.4@17588.03,14953 ; v1(18496,14761) 18495,14760 18495,14651.03 U00-2.13@18498.03,14648
  Bottom Layer w12: C00-5.2@16658,14747 16798,14747 16845,14794 17571,14794 v1(17590,14775) 18481,14775 v1@18496,14760
TCD2: C00-6.2 NAND1.12 U00-4.13 U03-2.9 U6.13 | length 7755.9
  Top Layer w12: v1(13320,12631) 13329,12622 13329,12087 v1(13321,12079) ; v1(14288,12695) 14292,12699 v1(14292,13900) ; v1(14861,13947) v1@14861,14553 ; C00-6.2@16891,14748 v1(16890,14556) v1@16893,14580 ; U00-4.13@17588.03,14648 17591,14645.03 v1(17591,14562)
  Bottom Layer w12: U03-2.9@12567,12073 13316,12073 v1@13325,12082 ; v1@13323,12629 13328,12634 U6.13@13486,12634 13547,12695 v1@14291,12695 ; v1@14300.53,13900.47 14526.53,13900.47 14572.06,13946 NAND1.12@14781,13946 v1@14863,13946 ; v1(14862,14556) 14864,14554 16888,14554 v1(16890,14556) 16894,14560 17570,14560 v1@17592,14582
VCC: 104.2 150u.1 DG100.1 DG101.1 DG102.1 DG103.1 DG104.1 DG105.1 DG106.1 DG107.1 DR100.1 DR101.1 DR102.1 DR103.1 DR104.1 DR105.1 DR106.1 DR107.1 J1.1 NAND1.14 NAND2.14 NAND3.14 NOT.14 R00.1 R01.1 R02.1 R03.1 R04.1 R05.1 R06.1 R07.1 R50.2 R51.2 R52.2 R53.2 R54.2 R55.2 R56.2 R57.2 R150.2 R151.2 R152.2 R153.1 R154.2 R156.2 R200.1 R201.1 R202.1 R203.1 R250.2 R251.2 R266.1 R267.1 R268.1 R269.1 R270.1 R271.1 U00-1.3 U00-1.4 U00-1.16 U00-2.5 U00-2.16 U00-3.3 U00-3.4 U00-3.16 U00-4.5 U00-4.16 U00-5.16 U00-6.14 U01-1.20 U01-2.16 U01-3.7 U01-3.16 U01-4.3 U01-4.16 U02-1.11 U02-1.20 U02-2.11 U02-2.20 U03-1.2 U03-1.3 U03-1.10 U03-1.11 U03-1.16 U03-2.3 U03-2.10 U03-2.11 U03-2.16 U03-3.16 U05-1.15 U05-1.16 U05-2.16 U05-3.3 U05-3.4 U05-3.16 U05-4.3 U05-4.4 U05-4.16 U6.14 | length 67073.4
  Top Layer w12: DR100.1@11010.58,16215.56 11124.14,16102 R50.2@11133,16102 11140.04,16102 DG100.1@11253.6,16215.56 ; 150u.1@11115,14510 104.2@11115,14826 ; U03-1.3@11296,13873.13 U03-1.2@11296,13973.13 ; U03-1.10@11596,13473.13 U03-1.11@11596,13573.13 11641.53,13618.65 11641.53,14018.65 11596,14064.18 U03-1.16@11596,14073.13 11596,14075.98 11680,14159.98 11680,14549 U02-1.11@11676,14553 ; U02-2.11@12368,14570 12368,14265 12665,13968 NAND2.14@12665,13964 ; U03-2.10@12567,12173 U03-2.11@12567,12273 12491,12349 12491,12697 U03-2.16@12567,12773 ; v1(12958,16094) 12958,15461.67 U01-1.20@12959.16,15460.51 ; v1@13392,12383 13392,12640 U6.14@13486,12734 ; R53.2@13538,16102 13538,15463.76 U01-2.16@13546.76,15455 ; v1(14602,15319) 14602,14788 v1(14628,14762) 14628,14457 14677,14408 14677,14250 NAND1.14@14781,14146 ; R203.1@14993,12763 R201.1@14993,12988 ; R250.2@15673,12443 R251.2@15673,12625 ; v1(17050,14425) v1(17050,14855) ; R07.1@17185,14111 R06.1@17185,14213 R05.1@17185,14315 R04.1@17185,14417 ; v1@17187.03,15377.97 U00-3.16@17187.03,15465 ; U05-4.4@17278,12271 17278,12154.06 17325.53,12106.53 v1@17325.53,11684 ; v1(17385,15370) 17385,15167.03 U00-3.3@17387.03,15165 ; U00-3.4@17487.03,15165 17487.03,14949 U00-4.5@17488.03,14948 v1@17488.03,14871.97 ; v1@17580,11695 U05-1.15@17580,11761 ; U00-4.16@17888.03,14648 17890,14649.97 v1(17890,14825) ; v1(18395,14860) 18395,14944.97 U00-2.5@18398.03,14948 18397.03,14949 U00-1.4@18397.03,15168
  Bottom Layer w12: 10723,12862 11304,12862 U03-3.16@11390,12776 11344.47,12730.47 11344.47,12557.14 11371.14,12530.47 11604.53,12530.47 R153.1@11654,12481 11784,12481 R154.2@11872,12393 ; 10723,13278 10724,13277 R151.2@11912,13277 R150.2@12040,13277 ; 10723,13966 10730.13,13973.13 U03-1.2@11296,13973.13 ; 10723,14788 10731,14780 10961,14780 11007,14826 104.2@11115,14826 ; 10812,11613 10814,11611 ; J1.1@11037,15273 11322.53,15273 11362.53,15313 11423,15313 11570,15460 U02-1.20@11676,15460 11787.02,15460 11833.51,15413.51 12323.08,15413.51 U02-2.20@12370.08,15460.51 12565.16,15460.51 12612.16,15507.51 12912.16,15507.51 U01-1.20@12959.16,15460.51 ; 150u.1@11115,14510 11116,14511 11631,14511 U02-1.11@11678,14558 ; DG100.1@11253.6,16215.56 11271.6,16215.56 11312.6,16174.56 11769.56,16174.56 11810.56,16215.56 DR101.1@11814.58,16215.56 11824.44,16215.56 R51.2@11938,16102 11943.04,16102 DG101.1@12056.6,16215.56 12097.6,16174.56 12573.58,16174.56 DR102.1@12614.58,16215.56 12624.44,16215.56 R52.2@12738,16102 ; U02-1.11@11676,14560 11976.59,14560 12023.08,14513.51 12323.08,14513.51 U02-2.11@12370.08,14560.51 ; R154.2@11876,12376 11943,12443 11943,12549 11967,12573 U03-2.3@12267,12573 ; U03-2.3@12277,12583 U03-2.3@12267,12573 ; v1(12486,12583) 12476,12573 U03-2.3@12267,12573 ; U03-2.11@12567,12273 12673,12379 13032,12379 13032.53,12379.53 13386.47,12379.53 v1(13387,12379) ; NAND2.14@12665,13964 12710.53,14009.53 13343.47,14009.53 NAND3.14@13389,13964 ; v1@12954,16096 12948,16102 R52.2@12738,16102 ; U6.14@13486,12734 13543,12791 R156.2@13659,12791 ; U01-2.16@13546.76,15455 13998.72,15455 NOT.14@14135.84,15317.87 14139.24,15314.47 14604.47,15314.47 14650,15360 U01-3.16@14724.92,15360 14944.94,15360 14990.47,15314.47 15290.47,15314.47 U01-4.16@15336,15360 15136,15160 U01-4.3@15036,15160 ; U01-3.7@14424.92,14760 14629,14760 v1@14630,14761 ; NAND1.14@14781,14146 15015.95,14146 15079.48,14209.53 15627.47,14209.53 U00-6.14@15673,14164 15676.4,14167.4 16087.4,14167.4 16141.88,14221.88 U00-5.16@16176,14221.88 ; R203.1@14993,12763 R202.1@15114,12763 15331.44,12763 15371.44,12723 15575,12723 R251.2@15673,12625 15985.88,12625 16070.88,12710 16826,12710 16965,12571 U05-4.16@16978,12571 16978,12471 U05-4.3@17178,12271 U05-4.4@17278,12271 17476,12469 17892,12469 ; R201.1@14993,12988 R200.1@15114,12988 ; DG107.1@16857.6,16240 16857.6,16221.6 R57.2@16738,16102 16728.14,16102 DR107.1@16614.58,16215.56 16573.58,16174.56 16115.6,16174.56 16074.6,16215.56 DG106.1@16056.6,16215.56 15943.04,16102 R56.2@15938,16102 15824.44,16215.56 DR106.1@15814.58,16215.56 15773.58,16174.56 15315.6,16174.56 15274.6,16215.56 DG105.1@15256.6,16215.56 15251.56,16215.56 R55.2@15138,16102 15024.44,16215.56 DR105.1@15014.58,16215.56 14973.58,16174.56 14515.6,16174.56 14474.6,16215.56 DG104.1@14456.6,16215.56 14451.56,16215.56 R54.2@14338,16102 14224.44,16215.56 DR104.1@14214.58,16215.56 14172.56,16215.56 14131.56,16174.56 13715.6,16174.56 13674.6,16215.56 DG103.1@13656.6,16215.56 13543.04,16102 R53.2@13538,16102 13528.14,16102 DR103.1@13414.58,16215.56 13373.58,16174.56 12915.6,16174.56 12874.6,16215.56 DG102.1@12856.6,16215.56 12743.04,16102 R52.2@12738,16102 ; v1(17050,14425) 17177,14425 R04.1@17185,14417 ; v1(17050,14855) 17470,14855 v1(17485,14870) 17495,14860 v1(18395,14860) ; v1(17190,15375) v1@17385,15375 ; v1(17326,11684) 17578,11684 v1(17579,11685) ; U00-3.3@17387.03,15165 U00-3.4@17487.03,15165 ; U05-1.15@17580,11761 U05-1.16@17680,11761 17685,11756 17685,11635 ; v1(17890,14825) 17890,14860 ; U05-3.16@17892,12569 17892,12469 ; U00-1.16@18097.03,15468 18097.03,15368 U00-1.3@18297.03,15168 U00-1.4@18397.03,15168 ; U05-3.4@18192,12269 U05-3.3@18092,12269 17892,12469 ; U00-2.5@18398.03,14948 18406.98,14948 18452.5,14902.47 18543.56,14902.47 U00-2.16@18798.03,14648 19402,14648 19415,14635 ; U05-2.16@18594,11761 18594,11636 18595,11635 18595,11615 18600,11610 ; R00.1@19253,14416 R02.1@19253,14212 R03.1@19253,14110 19253,13897.41 R271.1@19250,13894.41 R266.1@19250,13774.41 R267.1@19250,13654.41 R269.1@19250,13414.41 R270.1@19250,13294.41 19414.41,13294.41 19415,13295
  Bottom Layer w50: 10723,15245 10721.44,15246.56 10721.44,16861.44 10840,16980 19330,16980 19415,16895 19415,11870 19156,11611 17675,11611 10814,11611 ; 10812,11613 10723,11702 10723,15273 J1.1@11037,15273
"": 
pads on no net: DS00-1.5 DS00-2.5 DS01-1.5 DS05-1.5 DS05-2.5 DS05-3.5 NOT.12 NOT.13 U00-2.12 U00-4.12 U00-5.1 U00-5.2 U00-5.6 U00-5.9 U00-5.13 U00-5.14 U00-5.15 U00-6.8 U00-6.9 U00-6.10 U00-6.11 U00-6.12 U00-6.13 U01-2.15 U01-3.9 U03-1.4 U03-1.12 U03-2.4 U03-2.12 U03-3.4 U03-3.5 U03-3.6 U03-3.7 U03-3.9 U03-3.10 U03-3.11 U03-3.12 U05-1.12 U05-1.13 U6.3 U6.11

## Keep-outs
Keep-Out Layer:
  lines w10: 10560,11590 10630,11520 19340,11520 19550,11730 19550,17050 19475,17125 10625,17125 10560,17060 10560,11590

## Silkscreen, mask and mechanical layers (free items; w line width, h text height)
Top Overlay:
  text "G19-5597-5487-5616" at 15775,13020 h60